# Altium PCB USB_RS485_UART.PcbDoc
Units mm, origin at the board's own origin, x right, y up, seen from the top; angles counter-clockwise.
Board outline 83.82 x 116.46 mm, 2 copper layers (Top Layer, Bottom Layer); 45 components, 33 nets, 147 pads, 0 vias.
Unrouted connection lines stored in the file: 95.
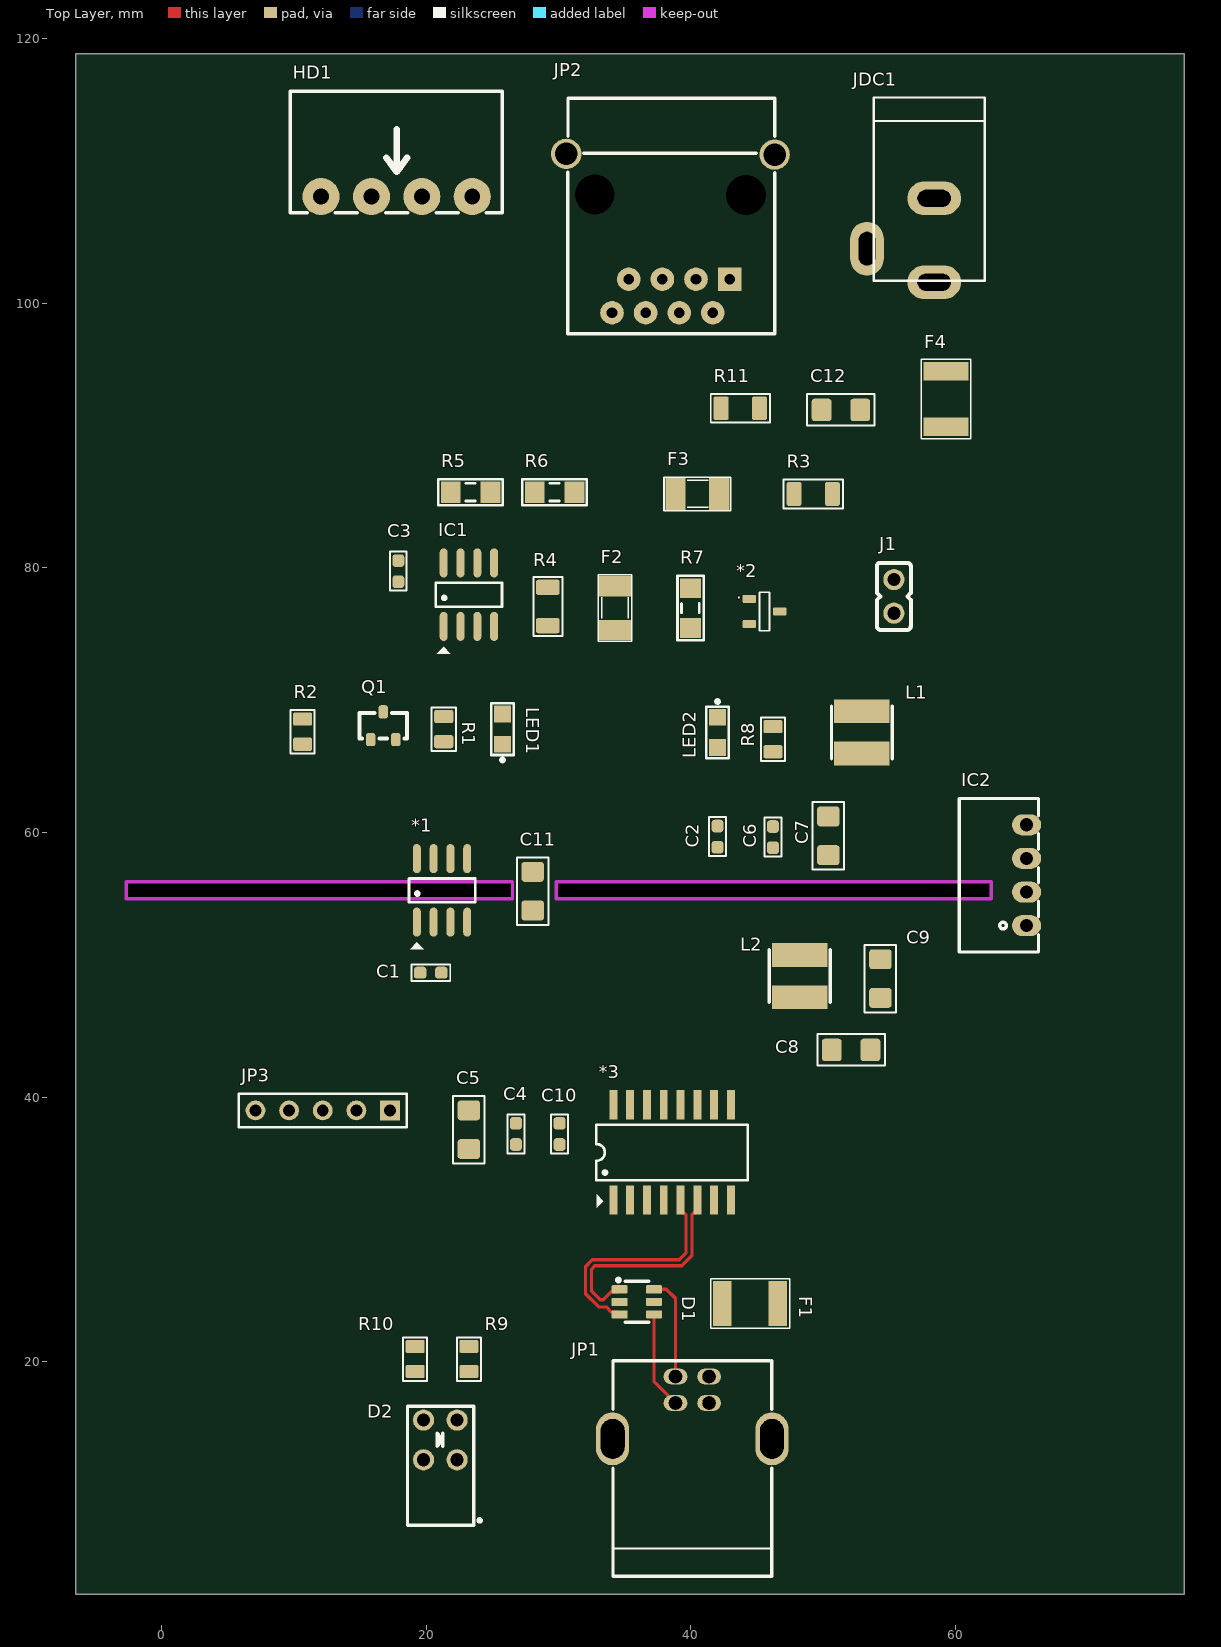
[diagram p0: Top Layer view]
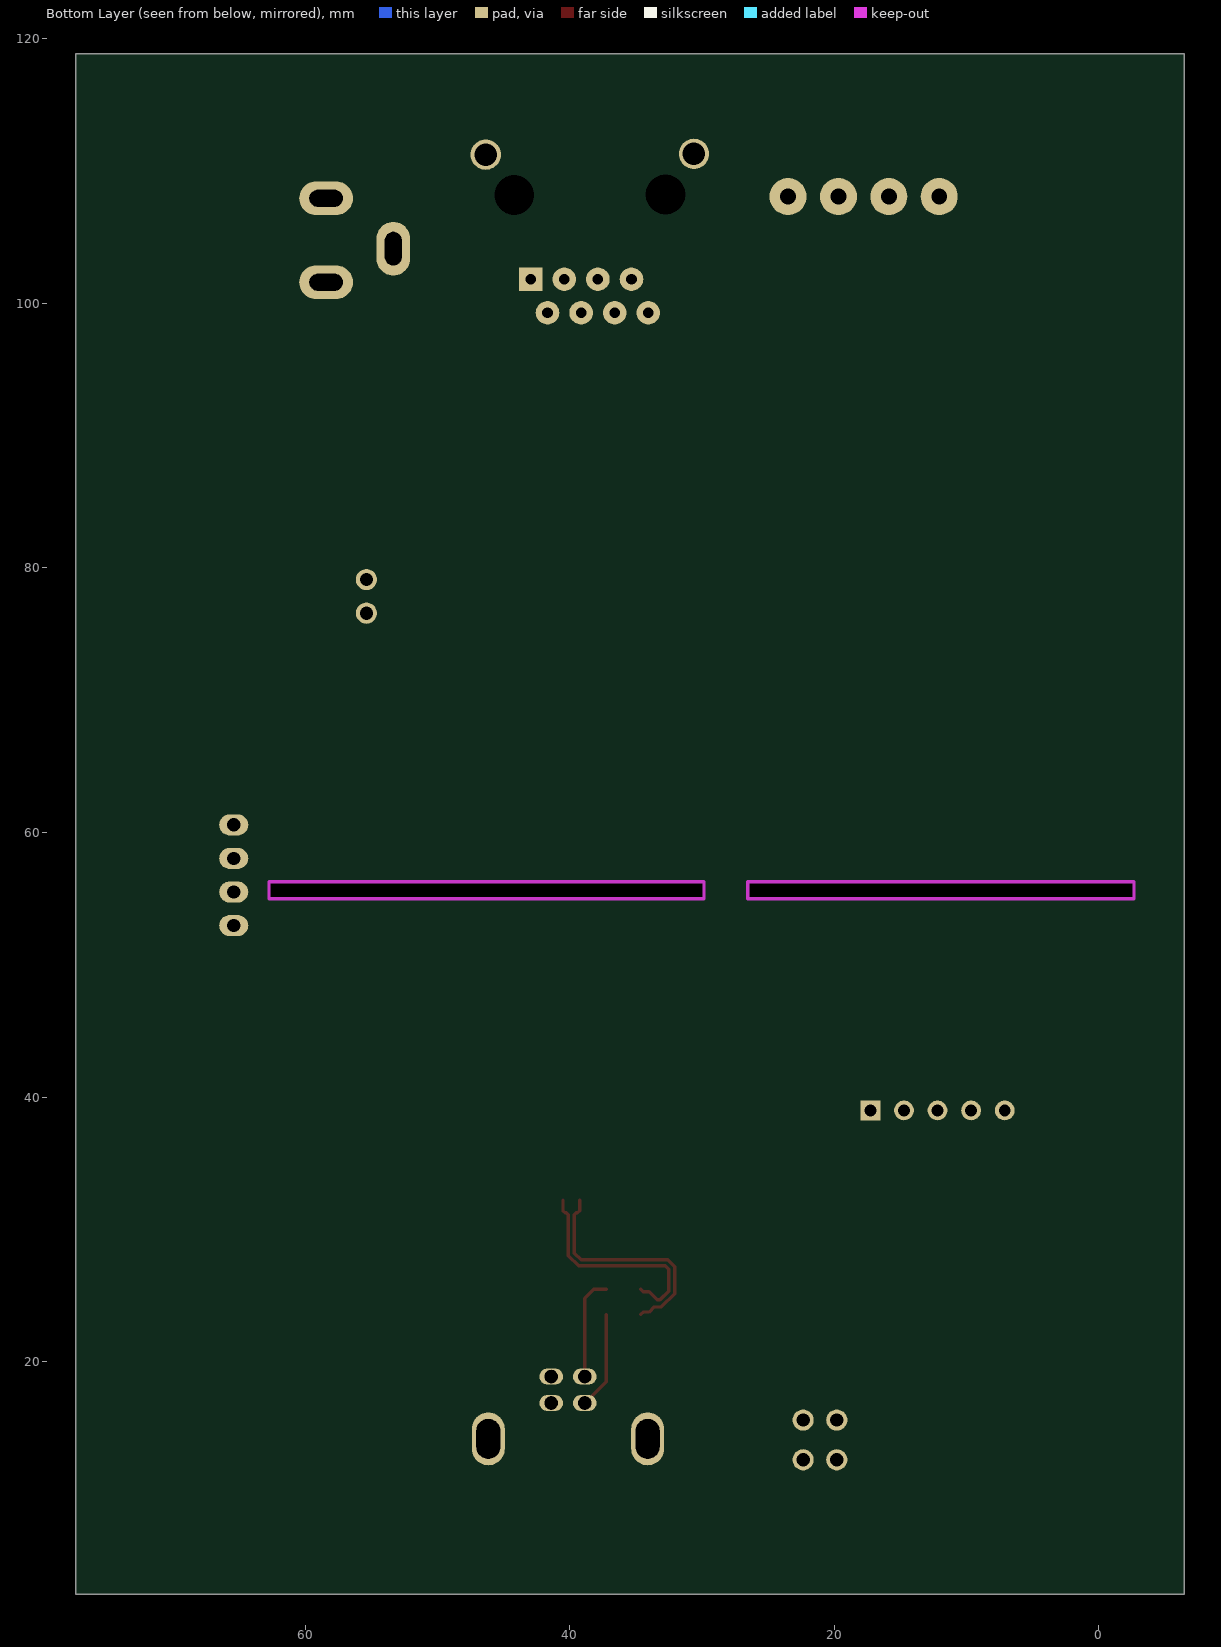
[diagram p1: Bottom Layer view, seen from below]

## Layer stack, top to bottom
Top Solder: solder mask 0.0102, Solder Resist, Dk 3.5
Top Layer: signal copper 0.0356
Dielectric 1: dielectric 0.32, FR-4, Dk 4.8
Bottom Layer: signal copper 0.0356
Bottom Solder: solder mask 0.0102, Solder Resist, Dk 3.5

## Board outline
-6.477,118.872 77.343,118.872 77.343,2.413 -6.477,2.413
cut-out: 29.845,54.982 62.738,54.982 62.738,56.27 29.845,56.27
cut-out: -2.667,54.982 26.543,54.982 26.543,56.27 -2.667,56.27

## Design rules (kind name [scope] priority, off if disabled: settings)
Clearance [All] p1: gap=0.254 ignorepadtopadclearanceinfootprint=FALSE
DiffPairsRouting [All] p1: maxlimit=0.2 minlimit=0.2 mostfreqgap=0.2 toplayer_minwidth=0.254 toplayer_maxwidth=0.254 toplayer_prefwidth=0.254 bottomlayer_minwidth=0.254 bottomlayer_maxwidth=0.254 bottomlayer_prefwidth=0.254 maxuncoupledlength=12
PolygonConnect [All] p1: connectstyle=Relief reliefconductorwidth=0.254 reliefentries=4 polygonreliefangle="90 Angle" airgapwidth=0.254
RoutingVias [All] p1: holewidth=0.711 width=1.27 viastyle="Through Hole" minholewidth=0.711 minwidth=1.27 maxholewidth=0.711 maxwidth=1.27
SolderMaskExpansion [All] p1: expansion=0.102 istentingtop=FALSE
Width Width_RS485 [All] p1: maxlimit=0.8 minlimit=0.254 preferedwidth=0.5
Width Width_Power [InNetClass('POWER')] p2: maxlimit=0.8 minlimit=0.254 preferedwidth=0.6
Width Width_Signal [InNetClass('Signal')] p3: maxlimit=0.5 minlimit=0.254 preferedwidth=0.3
29 further rules are at their usual default settings.

## Classes and differential pairs
differential pair UD: +UD_P -UD_N

## Components (designator, comment, footprint, x,y, rotation, side; value= is the part's Value field where it differs from the comment)
*1 "AduM1201" SO-8 21.209,55.626 r90 top
*2 "SM712_SMD" SOT23-3 45.593,76.708 r0 top
*3 "CH340C" SOP16 38.608,35.814 r0 top
C1 "100nF" C_0603 20.358,49.403 r180 top
C2 "100nF" C_0603 42.037,59.69 r90 top
C3 "100nF" C_0603 17.907,79.756 r270 top
C4 "100nF" C_0603 26.797,37.211 r90 top
C5 "4.7uF" C_1206 23.241,37.592 r90 top
C6 "100nF" C_0603 46.228,59.652 r90 top
C7 "10uF" C_1206 50.419,59.817 r90 top
C8 "4.7uF" C_1206 52.07,43.561 r180 top
C9 "4.7uF" C_1206 54.356,49.022 r90 top
C10 "100nF" C_0603 30.099,37.211 r270 top
C11 "1nF" C_1206 28.067,55.626 r90 top
C12 "4.7uF" C_1206 51.435,91.948 r0 top
D1 "TPUSBLC6-2SC6" SOT-23-6_L2.9-W1.6-P0.95-LS2.8-BR 35.941,24.511 r180 top
D2 "2LED_3MM" 2LED_3MM 21.082,14.073 r0 top
F1 "PTC 1812 0.75A" Fuse_1812_smd 44.509,24.384 r180 top
F2 "Fast Acting" FUSE-SM-1206 34.29,75.311 r90 top value=500mA
F3 "Fast Acting" FUSE-SM-1206 38.862,85.598 r0 top value=500mA
F4 "PTC 1812 0.75A" Fuse_1812_smd 59.309,92.778 r90 top
HD1 "Header 4" "Terminal plug 3.81_4P" 17.78,108.077 r0 top
IC1 "MAX485-SOIC8" SO-8 23.241,77.978 r90 top
IC2 "B0505S-1WR3" PWRM-TH_BXXXXS-1WR3 65.405,56.769 r90 top
J1 "Jumper" Header_2 55.372,77.851 r270 top
JDC1 "Jac DC" DC0 55.88,104.775 r270 top
JP1 "U241-041N-1BR85-1" USB-B-TH_U241-041N-1BR85-1 40.132,16.51 r0 top
JP2 "RJ45-TH" RJ45R10P-B000 42.951,101.829 r270 top
JP3 "HDR1x5" HDR1X5 17.272,38.989 r180 top
L1 "10uH" IND-SMD_L4.0-W4.0 52.959,67.564 r270 top
L2 "6.8uH" IND-SMD_L4.0-W4.0 48.26,49.149 r90 top
LED1 "LED 0805" LED0805 25.781,67.818 r90 top
LED2 "LED 0805" LED0805 42.037,67.564 r270 top
Q1 "2N3904" "17# 2SC1815-HF" 16.764,68.072 r0 top
R1 "1k" R_0805 21.336,67.818 r270 top
R2 "4.7k" R_0805 10.668,67.625 r90 top
R3 "120R" R_1206 49.276,85.598 r180 top
R4 "1k" R_1206 29.21,77.089 r270 top
R5 "10R" "tro smd 1206" 23.368,85.725 r0 top
R6 "10R" "tro smd 1206" 29.718,85.725 r0 top
R7 "1k" "tro smd 1206" 40.005,76.962 r90 top
R8 "1k" R_0805 46.228,67.056 r90 top
R9 "560OHM" R_0805 23.241,20.193 r270 top
R10 "560OHM" R_0805 19.177,20.193 r270 top
R11 "100OHM" R_1206 43.762,92.075 r0 top

## Footprints (in the part's own frame and the unit in brackets; to place one, negate y for a bottom-side part, rotate by r counter-clockwise, add the part's x,y. Pads: shape width x height; smd on the part's side, far side on the other; paste and mask are expansions set on the pad)
2LED_3MM [mm]
  round 1.6 hole 1: 1(-1.27,-1.5) 2(1.27,-1.5) 3(-1.27,1.5) 4(1.27,1.5)
  silkscreen extent -2.49,-6.45 3.1,2.54, body extent -2.13,-9.61 2.17,2.59, height 9.8
"17# 2SC1815-HF" [mm] "SOT23-3"
  rrect50% 0.7x1 smd: 1(-0.95,-1.05) 2(0.95,-1.05) 3(0,1.05)
  silkscreen extent -1.8,-0.95 1.8,0.95, body extent -1.5,-1.32 1.5,1.32, height 1.08
C_0603 [mm]
  rrect50% 0.95x0.9 smd: 1(-0.8,0) 2(0.8,0)
  silkscreen extent -1.47,-0.64 1.47,0.64, body extent -0.8,-0.4 0.8,0.4, height 0.3
C_1206 [mm]
  rrect30% 1.5x1.7 smd: 1(-1.524,0) 2(1.397,0)
  silkscreen extent -2.62,-1.19 2.49,1.19, body extent -1.74,-0.8 1.54,0.8, height 1.6
DC0 [mil]
  oval 100x160 hole 50 slot 100 at 90 deg: 1(125,100) 2(-125,100)
  oval 160x100 hole 50 slot 100 at 0 deg: 3(25,-100)
  silkscreen extent -425,-80 120,250, body extent -410,-105 134,269, height 434
FUSE-SM-1206 [mil]
  rect 60x100 smd: 1(0,0) 2(130,0)
  silkscreen extent -34,-50 164,50, body extent 7,-51 133,51, height 27
Fuse_1812_smd [mm] "Fuse"
  rect 1.4x3.4 smd: 1(-2.1,0) 2(2.1,0)
  silkscreen extent -3,-1.88 3,1.88, body extent -2.35,-1.7 2.38,1.71, height 1.34
HDR1X5 [mm] "Connector; Header; 5 Position"
  rect 1.5x1.5 hole 0.9: 1(0,0)
  round 1.5 hole 0.9: 2(2.54,0) 3(5.08,0) 4(7.62,0) 5(10.16,0)
  silkscreen extent -1.27,-1.27 11.43,1.27, body extent -1.27,-1.27 11.43,1.27, height 7
Header_2 [mm] "Connector DIP, 2Pin_2.54mm"
  round 1.6 hole 1 mask+0.1: 1(-1.27,0) 2(1.27,0)
  silkscreen extent -2.54,-1.28 2.54,1.28, body extent -2.54,-1.27 2.54,1.27, height 10.1
IND-SMD_L4.0-W4.0 [mm]
  rect 1.8x4.2 smd: 1(-1.6,0) 2(1.6,0)
  silkscreen extent -2,-2.3 2,2.3, body extent -2.01,-2.01 2.01,2.01, height 1.2
LED0805 [mil] "Chip Resistor; Body 2.0 x 1.3 mm (LxW typ)"
  rect 50x50 smd: 1(-45,0) 2(45,0)
  silkscreen extent -97,-33 77,33, body extent -60,-25 60,25, height 47
PWRM-TH_BXXXXS-1WR3 [mm]
  oval 1.6x2.2 hole 1: 1(-3.81,0) 2(-1.27,0) 3(1.27,0) 4(3.81,0)
  silkscreen extent -5.8,-0.9 5.8,5.1, body extent -6.05,-0.83 5.55,5.17, height 10.17
R_0805 [mm]
  rrect30% 1x1.45 smd: 1(-0.95,0) 2(0.95,0)
  silkscreen extent -1.64,-0.91 1.64,0.91, body extent -1,-0.63 1,0.63, height 0.6
R_1206 [mm]
  rrect30% 1.15x1.8 smd: 1(-1.45,0) 2(1.45,0)
  silkscreen extent -2.24,-1.09 2.24,1.09, body extent -1.93,-0.81 1.87,0.79, height 0.6
RJ45R10P-B000 [mil]
  rect 70x70 hole 31.5: 1(0,0)
  round 70 hole 31.5: 2(100,-50) 3(0,-100) 4(100,-150) 5(0,-200) 6(100,-250) 7(0,-300) 8(100,-350)
  round 90.55 hole 66.93: 9(-373.09,-486.02) 9(-371.09,134)
  round 0 hole 118.11 unplated: ""(-252,-401) ""(-251,49)
  silkscreen extent -538,-482 162,134, body extent -573,-478 163,128, height 529
SO-8 [mm] "8-Pin Small Outline Integrated Circuit 1.27 mm Pitch, IPC Medium Density"
  oval 2.2x0.6 smd: 1(-2.4,1.905) 2(-2.4,0.635) 3(-2.4,-0.635) 4(-2.4,-1.905) 5(2.4,-1.905) 6(2.4,-0.635) 7(2.4,0.635) 8(2.4,1.905)
  silkscreen extent -4.44,-2.5 0.9,2.5, body extent -2.89,-2.43 3.15,2.59, height 1.6
SOP16 [mm] "Small Outline; 16 Leads; Body Width 5.6 mm; Pitch 1.27 mm"
  rect 0.6x2.2 smd: 1(-4.445,-3.6) 2(-3.175,-3.6) 3(-1.905,-3.6) 4(-0.635,-3.6) 5(0.635,-3.6) 6(1.905,-3.6) 7(3.175,-3.6) 8(4.445,-3.6) 9(4.445,3.6) 10(3.175,3.6) 11(1.905,3.6) 12(0.635,3.6) 13(-0.635,3.6) 14(-1.905,3.6) 15(-3.175,3.6) 16(-4.445,3.6)
  silkscreen extent -5.73,-4.19 5.73,2.1, body extent -5.22,-3.63 5.08,3.37, height 2.1
SOT23-3 [mm] "SOT23, 3 pin"
  round 0.5 on Mech15: 0(0,0)
  rrect25% 1x0.6 smd: 1(-1.15,0.95) 2(-1.15,-0.95) 3(1.15,0)
  silkscreen extent -0.38,-1.45 0.38,1.45, body extent -1.4,-1.45 1.4,1.45, height 1.29
SOT-23-6_L2.9-W1.6-P0.95-LS2.8-BR [mm]
  rrect30% 1.22x0.62 smd: 1(1.3,-0.95) 2(1.3,0) 3(1.3,0.95) 4(-1.3,0.95) 5(-1.3,0) 6(-1.3,-0.95)
  silkscreen extent -0.9,-1.78 1.52,1.55, body extent -1.4,-1.45 1.4,1.45, height 1.45
"Terminal plug 3.81_4P" [mm]
  round 2.8 / inner round 3 / far side round 2.8 hole 1.2: 1(-5.715,0) 2(-1.905,0) 3(1.905,0) 4(5.715,0)
  silkscreen extent -8.05,-1.22 7.98,7.98, body extent -8.06,-1.22 7.97,7.98, height 7.2
"tro smd 1206" [mm]
  rect 1.5x1.6 smd: 1(-1.5,0) 2(1.5,0)
  silkscreen extent -2.44,-0.99 2.44,0.99, body extent -1.6,-0.8 1.6,0.8, height 0.6
USB-B-TH_U241-041N-1BR85-1 [mm]
  oval 1.8x1.2 hole 1: 1(1.27,2.355) 2(-1.27,2.355) 3(-1.27,0.355) 4(1.27,0.355)
  oval 2.5x4 hole 1.8 slot 3 at 90 deg: 5(6.025,-2.355) 6(-6.025,-2.355)
  silkscreen extent -6,-12.75 6,3.55, body extent -7.42,-12.82 7.42,3.68, height 10.97

## Part data
*3: library part "CH340C dip"
C1 C2 C3 C4 C10: library part CC0603KRX7R9BB104, "100nF 50V X7R ±10% 0603 Multilayer Ceramic Capacitors MLCC - SMD/SMT ROHS", LCSC Part Number=C14663, Manufacturer=YAGEO, Package=0603, Manufacturer Part Number=CC0603KRX7R9BB104, SMT Assembly=Yes
C5 C6 C7 C8 C9 C12: library part 1206B475K500NT, "4.7uF 50V X7R ±10% 1206 Multilayer Ceramic Capacitors MLCC - SMD/SMT ROHS", LCSC Part Number=C29823, Manufacturer="FH(Guangdong Fenghua Advanced Tech)", Package=1206, Manufacturer Part Number=1206B475K500NT, SMT Assembly=Yes
C11: library part CC1206JKNPOCBN102, "1nF ±5% 1kV NP0 1206 Multilayer Ceramic Capacitors MLCC - SMD/SMT RoHS", LCSC Part Number=C113872, Manufacturer=YAGEO, Package=1206, ComponentLink1Description="Digikey Link", ComponentLink1URL=https://www.digikey.com/en/products/detail/yageo/CC0603KRX7R9BB104/2103082?s=N4IgTCBcDaIMwEYEFoFwCzuWZA5AIiALoC%2BQA, ComponentLink2Description="LCSC Link", ComponentLink2URL=https://jlcpcb.com/parts/componentSearch?searchTxt=10k%200603, Manufacturer Part Number=CC1206JKNPOCBN102, SMT Assembly=Yes
D1: library part ESD_TPUSBLC6-2SC6, "ESD ROHS SOT23-6 DIODES", LCSC Part Number=C558442, Manufacturer="TECH PUBLIC", Package=SOT-23-6, BOM_Assembly Type=smtWeld, BOM_Paste Type=expand, BOM_Supplier=LCSC, Manufacturer Part Number=TPUSBLC6-2SC6, SMT Assembly=Yes, SMT Type=Extend, spicePre=D, spiceSymbolName=TPUSBLC6-2SC6
D2: library part 2LED3MM, "LED DUAL RED/GREEN DIFFUSED T/H", LCSC Part Number=No, Manufacturer=Lumex, Manufacturer Part Number=SSF-LXH240IGD, Package="Through Hole", ComponentLink1Description=https://datasheet.ciiva.com/16387/lumex20ssf-lxh240igd-16387412.pdf?src-supplier=Future+Electronics, ComponentLink1URL=https://datasheet.ciiva.com/16387/lumex20ssf-lxh240igd-16387412.pdf?src-supplier=Future+Electronics, ComponentLink2Description=https://datasheet.ciiva.com/4673/ssf-lxh240igd-59870-4673513.pdf?src-supplier=Mouser, ComponentLink2URL=https://datasheet.ciiva.com/4673/ssf-lxh240igd-59870-4673513.pdf?src-supplier=Mouser, ComponentLink3Description=https://datasheet.ciiva.com/14605/70127278-14605558.pdf?src-supplier=Allied+Electronics, ComponentLink3URL=https://datasheet.ciiva.com/14605/70127278-14605558.pdf?src-supplier=Allied+Electronics, ComponentLink4Description=https://datasheet.ciiva.com/16840/70127280-16840571.pdf?src-supplier=Allied+Electronics, ComponentLink4URL=https://datasheet.ciiva.com/16840/70127280-16840571.pdf?src-supplier=Allied+Electronics, ComponentLink5Description=https://datasheet.ciiva.com/1535/ssf-lxh240igd-1535964.pdf?src-supplier=Element14, ComponentLink5URL=https://datasheet.ciiva.com/1535/ssf-lxh240igd-1535964.pdf?src-supplier=Element14, ComponentLink6Description=https://datasheet.ciiva.com/1644/ssf-lxh240igd-1644716.pdf?src-supplier=Farnell, ComponentLink6URL=https://datasheet.ciiva.com/1644/ssf-lxh240igd-1644716.pdf?src-supplier=Farnell, ComponentLink7Description=https://datasheet.ciiva.com/1536/ssf-lxh240igd-1536046.pdf?src-supplier=Element14, ComponentLink7URL=https://datasheet.ciiva.com/1536/ssf-lxh240igd-1536046.pdf?src-supplier=Element14, ComponentLink8Description=https://datasheet.ciiva.com/1746/ssf-lxh240igd-1746846.pdf?src-supplier=Newark, ComponentLink8URL=https://datasheet.ciiva.com/1746/ssf-lxh240igd-1746846.pdf?src-supplier=Newark, ComponentLink9Description=http://datasheet.octopart.com/SSF-LXH240IGD-Lumex-datasheet-60839.pdf?src-supplier=Element14, ComponentLink9URL=http://datasheet.octopart.com/SSF-LXH240IGD-Lumex-datasheet-60839.pdf?src-supplier=Element14, ComponentLink10Description=http://datasheet.octopart.com/SSF-LXH240IGD-Lumex-datasheet-9743625.pdf?src-supplier=Allied+Electronics, ComponentLink10URL=http://datasheet.octopart.com/SSF-LXH240IGD-Lumex-datasheet-9743625.pdf?src-supplier=Allied+Electronics, SMT Assembly=No
F1 F4: library part Fuse_PTC_mSMD075-33V, "1812 PTC RESETTABLE FUSES ROHS 24V", LCSC Part Number=C70117, Manufacturer=TECHFUSE, Manufacturer Part Number=mSMD075-33V, Package=1812, Pricing 1="1=0.08630,10=0.04930 (LCSC)", SMT Assembly=Yes
F2 F3: library part FUSE_FAST_500mA_0603, "Fuse 500mA 32VDC 0603 SMD", DC Cold Resistance="0.25 Ohm", Manufacturer 1="AVX Corporation", Manufacturer Part Number 1=F0603E0R50FSTR, Operating Temperature="-55°C ~ 125°C", Package / Case="0603 (1608 metric)", Ratings="500mA; 32VDC; fast acting", Supplier Part Number 1=478-2860-1-ND, ComponentLink1Description=http://www.avx.com/docs/Catalogs/accug2.pdf, ComponentLink1URL=http://www.avx.com/docs/Catalogs/accug2.pdf, Fuse Type="Fast Acting", SCDType=source, Supplier 1=Digi-Key
HD1: library part Header4
IC1: library part MAX485_1
IC2: "B0505S-1WR3 5V 200mA 5.5V 1 Plugin Power Modules ROHS", Digikey Part Number=2725-B0505S-1WR3-ND, LCSC Part Number=C131038, Manufacturer="MORNSUN Guangzhou S& T", Manufacturer 2="Mornsun America, LLC", Package=SIP-4, Manual Assembly=Yes, Manufacturer Part Number=B0505S-1WR3, Manufacturer Part Number 2=B0505S-1WR3, SMT Assembly=No
J1: "Jumper Wire", LatestRevisionDate=17-Jul-2002, LatestRevisionNote="Re-released for DXP Platform.", PackageDescription="Radial Cap, Thru-Hole; 2 Leads; 0.2 in Pin Spacing", PackageReference=RAD-0.2, Published=24-Mar-1999, Publisher="Altium Limited"
JDC1: library part DCIN_1, "Jac DC input 5.5x2.1MM", LCSC Part Number=C718033, Manufacturer=JINJIA, Manufacturer Part Number=DC+02I, Package="Through Hole", SMT Assembly=No
JP1: library part USB_TYPE_B_U241, "USB - Type B Female USB 2.0 4 Through Hole USB Connectors RoHS", LCSC Part Number=C397338, Manufacturer="XKB Connectivity", Package="Through Hole", Manufacturer Part Number=U241-041N-1BR85-1, SMT Assembly=No
JP2: library part RJ45R10P-B000, "RJ45 18MM, No Transformer", LCSC Part Number=C386758, Manufacturer="Ckmtw(Shenzhen Cankemeng)", Manufacturer Part Number=R-RJ45R10P-B000, Package=RJ45-TH_R-RJ45R10P-B000, SMT Assembly=No
JP3: library part Header5, "Header IDC, 5 x 1 Pin Vertical 2.54mm Pitch (Non-Boxed, Male)", LCSC Part Number=No, Package="Through hole", ComponentLink1 Description=Manufacturer, ComponentLink1URL=http://www.we-online.com, ComponentLink2 Description=Datasheet, ComponentLink2URL=http://katalog.we-online.de/em/datasheet/6130xx143121.pdf, Manufacturer=No, Manufacturer Part Number=No, SMT Assembly=No
L1 L2: library part IND_SWP_6R8, "6.8UH ±20% 980MA 247MΩ SMD,3.0X3.0X1.2MM POWER INDUCTORS ROHS", LCSC Part Number=C83416, Manufacturer=Sunlord, Manufacturer Part Number=SWPA3012S6R8MT, Package=SMD,3.0x3.0x1.2mm, SMT Assembly=Yes
LED1 LED2: library part LEDSMD, "Dán", Chung_Loai=Dán, Don_Vi=Con
Q1: library part "17#2SC1815-SOT23 SMD", "2SC1815 50V 150mA  / NPN SMD Transistor (No Pb, GP- Green Part) / SOT-23 Package", ComponentLink1Description=tme.vn, ComponentLink1URL=http://www.tme.vn/Product.aspx?id=413#page=pro_info
R1 R2 R8: library part "Tro 0603 1% 1k", "Dán", Chung_Loai=Dán, Don_Vi=Con, Ma_Hang=MH006334, So_Chan=2, Ten_Linh_Kien="Trở 0603 1% 1k"
R3: library part "Tro 0805 5% 120R", "Dán", Chung_Loai=Dán, Don_Vi=Con, Ma_Hang=MH005253, So_Chan=2, Ten_Linh_Kien="Trở 0805 5% 120R"
R4: library part "Tro 0805 5% 1k", "Dán", Chung_Loai=Dán, Don_Vi=Con, Ma_Hang=MH005234, So_Chan=2, Ten_Linh_Kien="Trở 0805 5% 1k"
R5 R6 R7: library part "Tro 1206 5% 10R", "Dán", Chung_Loai=Dán, Don_Vi=Con, Ma_Hang=MH005910, So_Chan=2, Ten_Linh_Kien="Trở 1206 5% 10R"
R9 R10: library part 0603WAF5600T5E, "560OHMS ±1% 1/10W 0603 ROHS", LCSC Part Number=C23204, Manufacturer="Uniroyal Elec", Package=0603, ComponentLink1Description=https://datasheet.ciiva.com/7746/443971-7746518.pdf?src-supplier=Element14, ComponentLink1URL=https://datasheet.ciiva.com/7746/443971-7746518.pdf?src-supplier=Element14, ComponentLink2Description=https://datasheet.ciiva.com/2452/pyu-r-int-thick-7-2452887.pdf?src-supplier=Digi-Key, ComponentLink2URL=https://datasheet.ciiva.com/2452/pyu-r-int-thick-7-2452887.pdf?src-supplier=Digi-Key, ComponentLink3Description=https://datasheet.ciiva.com/12558/rc0603-272842-12558414.pdf?src-supplier=Mouser, ComponentLink3URL=https://datasheet.ciiva.com/12558/rc0603-272842-12558414.pdf?src-supplier=Mouser, ComponentLink4Description=https://datasheet.ciiva.com/7746/443971-7746517.pdf?src-supplier=Element14, ComponentLink4URL=https://datasheet.ciiva.com/7746/443971-7746517.pdf?src-supplier=Element14, ComponentLink5Description=https://datasheet.ciiva.com/2452/pyu-r-int-thick-7-2452888.pdf?src-supplier=Digi-Key, ComponentLink5URL=https://datasheet.ciiva.com/2452/pyu-r-int-thick-7-2452888.pdf?src-supplier=Digi-Key, ComponentLink6Description=https://datasheet.ciiva.com/2452/pyu-r-int-thick-7-2452889.pdf?src-supplier=Digi-Key, ComponentLink6URL=https://datasheet.ciiva.com/2452/pyu-r-int-thick-7-2452889.pdf?src-supplier=Digi-Key, Manufacturer Part Number=0603WAF5600T5E, SMT Assembly=Yes
R11: library part 0805W8F1000T5E, "100OHMS ±1% 1/8W 0805 ROHS", LCSC Part Number=C17408, Manufacturer="Uniroyal Elec", Package=0805, Manufacturer Part Number=0805W8F1000T5E, SMT Assembly=Yes

## Nets (pads, with @x,y where several pads share a name; then routed paths per layer and width w, separated by ;. In a path a pad name is that pad's centre, name@x,y a point inside that pad or via, vN(x,y) a via of type N, cw(c..) or ccw(c..) an arc to the next point about the centre after c; other vN are vias at no path point)
+5V_BOARD: *1.1 *3.16 C1.2 C4.2 C5.2 D1.5 D2.1 D2.3 F1.2 JP3.1
+5V_ISO: *1.8 C2.2 C3.2 C6.2 C7.2 IC1.8 L1.2 LED1.1 R7.1 R8.1
+5V_USB: F1.1 JP1.1
A: *2.1 F3.1 R3.2 R6.2 R7.2
B: *2.2 F2.1 J1.2 R4.1 R5.2
B0505_VIN: C9.2 IC2.2 L2.2
D+: D1.4 JP1.3 | length 7.4
  Top Layer w0.254: D1.4 37.241,18.486 38.381,17.346 38.381,17.302 38.818,16.865 JP1.3
D-: D1.6 JP1.2 | length 7.8
  Top Layer w0.254: D1.6 38.172,25.461 38.862,24.771 JP1.2
DCIN: F4.2 JDC1.1
DIR_CTRL: IC1.2 IC1.3 Q1.3 R1.1
GND: *1.4 *3.1 C1.1 C4.1 C5.1 C8.1 C9.1 C10.1 C11.1 D1.2 IC2.1 JP1.4 JP1.5 JP1.6 JP3.2 JP3.5
GND_ISO: *1.5 C2.1 C3.1 C6.1 C7.1 C11.2 C12.1 IC1.4 IC1.5 IC2.3 LED2.2 Q1.2 R4.2 R11.2
GND_PWR485: *2.3 HD1.1 JDC1.2 JDC1.3 JP2.4 JP2.5 R11.1
Net*3_4: *3.4 C10.2
NetC8_2: C8.2 L2.1
NetD2_2: D2.2 R10.2
NetD2_4: D2.4 R9.2
NetIC1_6: IC1.6 R6.1
NetIC1_7: IC1.7 R5.1
NetIC2_4: IC2.4 L1.1
NetJ1_1: J1.1 R3.1
NetLED1_2: LED1.2 R1.2
NetLED2_1: LED2.1 R8.2
NetQ1_1: Q1.1 R2.2
RS485_A: F3.2 HD1.3 JP2.8
RS485_B: F2.2 HD1.4 JP2.7
RXD: *1.2 *3.3 JP3.4 R9.1
RXD_ISO: *1.7 IC1.1
TXD: *1.3 *3.2 JP3.3 R10.1
TXD_ISO: *1.6 R2.1
UD_N: *3.6 D1.1 | length 16.8
  Top Layer w0.254: D1.1 34.458,25.278 34.004,25.278 33.65,24.924 33.386,24.66 33.175,24.66 32.512,25.324 32.512,26.978 32.766,27.232 39.331,27.232 40.105,28.006 40.105,31.092 40.254,31.241 40.34,31.241 40.513,31.414 *3.6
UD_P: *3.5 D1.3 | length 17.5
  Top Layer w0.254: D1.3 34.458,23.744 34.004,23.744 33.618,24.13 33.064,24.13 32.058,25.136 32.058,27.166 32.578,27.686 39.143,27.686 39.651,28.194 39.651,31.092 39.502,31.241 39.416,31.241 39.243,31.414 *3.5
VIN_RS485: C12.2 F4.1 HD1.2 JP2.1 JP2.2 JP2.6
pads on no net: *2.0 *3.7 *3.8 *3.9 *3.10 *3.11 *3.12 *3.13 *3.14 *3.15 JP2. JP2.3 JP2.9

## Keep-outs
Keep-Out Layer:
  lines w0.25: -2.667,54.982 26.543,54.982 26.543,56.27 -2.667,56.27 -2.667,54.982 ; 29.845,54.982 29.845,56.27 62.738,56.27 62.738,54.982 29.845,54.982

## Text inside footprints (layer, text, board x,y; h text height)
J1: Mechanical 1 "HD?" at 55.422,77.801 h0.8 r270; Mechanical 1 "2" at 55.118,76.835 h1.2 r270; Mechanical 1 "1" at 55.118,79.375 h1.2 r270
Q1: Mechanical 2 "C" at 16.614,68.372 h0.5; Mechanical 2 "E" at 17.524,67.217 h0.5; Mechanical 2 "B" at 15.624,67.217 h0.5